# EAGLE board thermochromic heater simple cutout (EAGLE 9.4.2), part 1 of 2
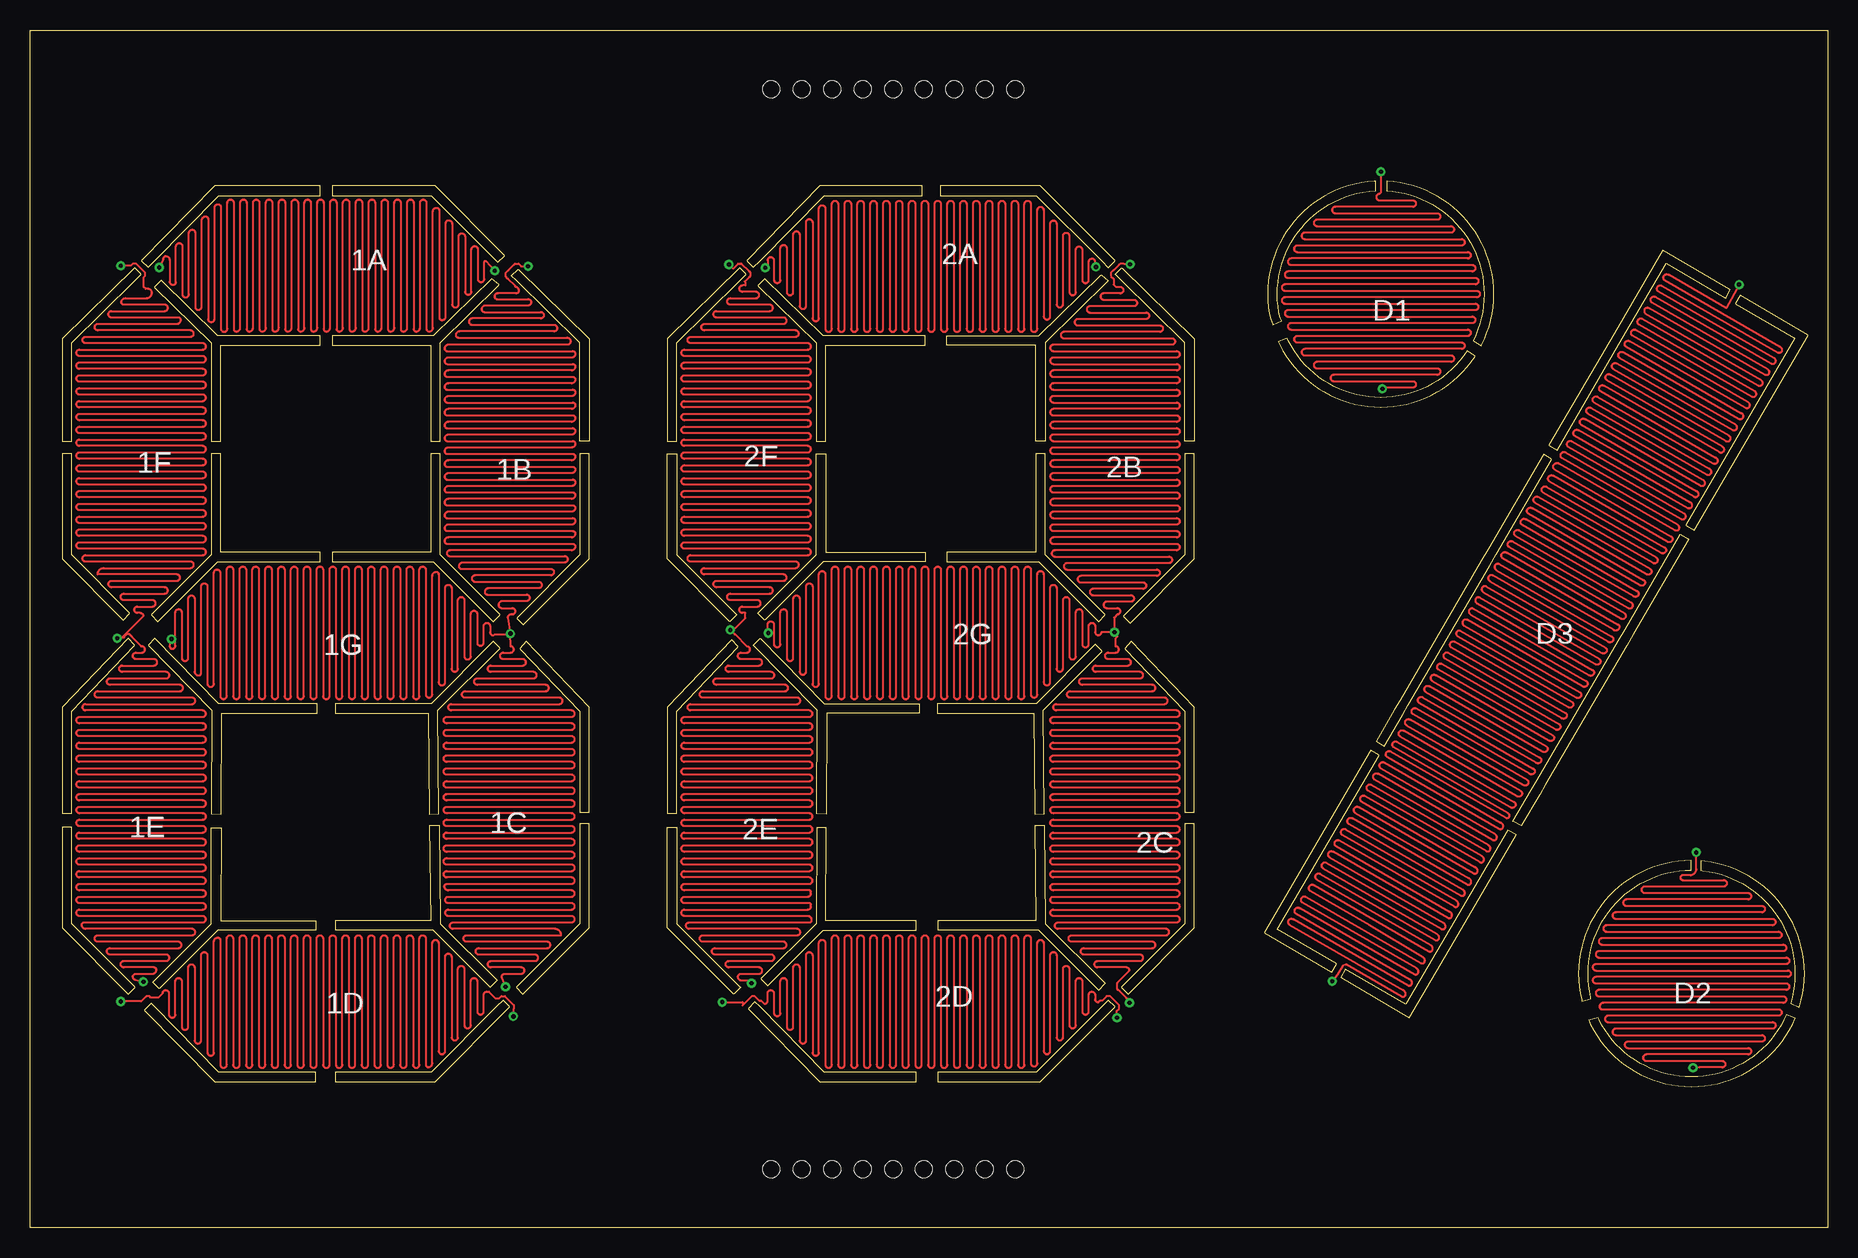
[diagram p0: board, top side]
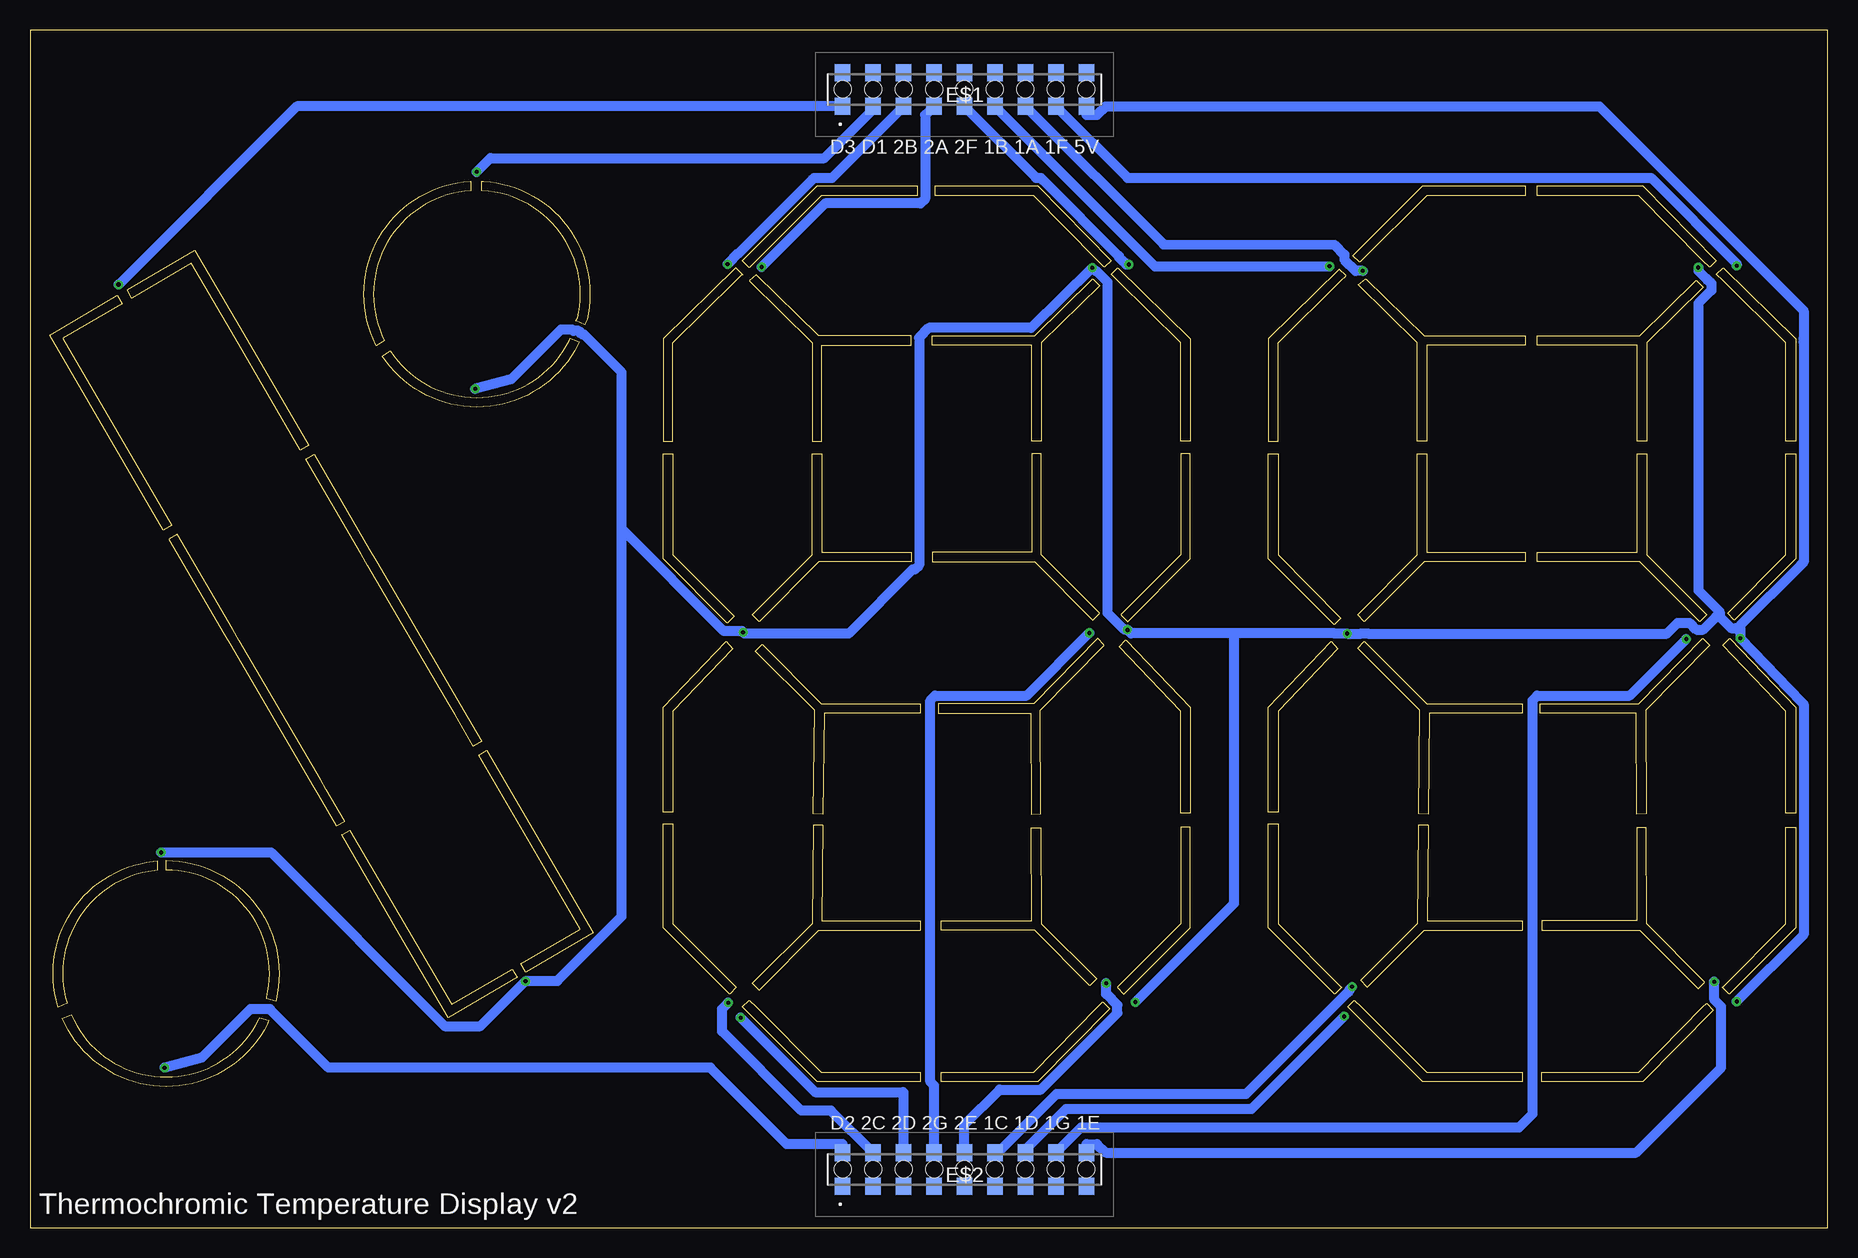
[diagram p1: board, bottom side, seen from below]

Size 149.8 x 99.8 mm. Coordinates in mm from the lower left corner, seen from the top.
Outline: 790 segments
Copper layers (1*16): Top 0.035mm / dielectric 1.5mm / Bottom 0.035mm
Design rules "default *": minimum track width 6mil, minimum drill 0.35mm, track to track 6mil, track to pad 6mil, pad to pad 6mil, via to via 6mil, smd to smd 6mil, copper to edge 10mil, drill to drill 6mil, minimum pad ring 10mil, minimum via ring 8mil, stop-mask expansion 4mil, vias tented up to drill 0mil, thermal gap 10mil

## Footprints (pad centres in the part's own frame; a part is rotated, then mirrored left to right if it is on the bottom)
91601309LF = smd 1.27 x 1.4: 1 -10.16,-1.4; 2 -7.62,-1.4; 3 -5.08,-1.4; 4 -2.54,-1.4; 5 0,-1.4; 6 2.54,-1.4; 7 5.08,-1.4; 8 7.62,-1.4; 9 10.16,-1.4; 10 10.16,1.4; 11 7.62,1.4; 12 5.08,1.4; 13 2.54,1.4; 14 0,1.4; 15 -2.54,1.4; 16 -5.08,1.4; 17 -7.62,1.4; 18 -10.16,1.4 | hole 1.4: -10.16,0; -7.62,0; -5.08,0; -2.54,0; 0,0; 2.54,0; 5.08,0; 7.62,0; 10.16,0

## Placement (x,y rotation side)
E$1  [91601309LF]  71.93,94.85 0 bottom
E$2  [91601309LF]  71.93,4.85 0 bottom

## Library data of the parts
E$1 E$2 = SamacSys_Parts

## Nets
S$5: E$1.1 E$1.2 E$1.3 E$1.4 E$1.5 E$1.6 E$1.7 E$1.8 E$1.9 E$2.10 E$2.11 E$2.12 E$2.13 E$2.14 E$2.15 E$2.16 E$2.17 E$2.18

## Tracks (layer width: path | path; a pad name or v marks a point on that pad's centre or on a via)
S$5  (via drill 0.35)
  Top 0.152: v90.38,49.6 90.35,49.63 | v90.38,49.6 90.61,49.38 90.61,49.25 90.47,49.11 90.47,48.45 arc-90 90.73,48.18 arc-90 90.47,47.91 89.86,47.91 arc90 89.59,47.64 arc90 89.86,47.38 91.48,47.38 arc-90 91.75,47.11 arc-90 91.48,46.84 88.84,46.84 arc90 88.57,46.57 arc90 88.84,46.31 92.5,46.31 arc-90 92.77,46.04 arc-90 92.5,45.77 87.7,45.77 arc90 87.43,45.5 arc90 87.7,45.24 93.51,45.24 arc-90 93.78,44.97 arc-90 93.51,44.7 86.68,44.7 arc90 86.41,44.43 arc90 86.68,44.16 94.53,44.16 arc-90 94.8,43.9 arc-90 94.53,43.63 85.54,43.63 arc90 85.27,43.36 arc90 85.54,43.09 95.55,43.09 arc-90 95.81,42.83 95.81,42.83 arc-90 95.55,42.56 85.28,42.56 arc90 85.02,42.29 85.02,42.29 arc90 85.28,42.02 95.55,42.02 arc-90 95.81,41.76 95.81,41.76 arc-90 95.55,41.49 85.28,41.49 arc90 85.02,41.22 85.02,41.22 arc90 85.28,40.95 95.55,40.95 arc-90 95.81,40.69 95.81,40.68 arc-90 95.55,40.42 85.28,40.42 arc90 85.02,40.15 85.02,40.15 arc90 85.28,39.88 95.55,39.88 arc-90 95.81,39.62 95.81,39.61 arc-90 95.55,39.35 85.28,39.35 arc90 85.02,39.08 85.02,39.08 arc90 85.28,38.81 95.55,38.81 arc-90 95.81,38.55 95.81,38.54 arc-90 95.55,38.28 85.28,38.28 arc90 85.02,38.01 85.02,38.01 arc90 85.28,37.74 95.55,37.74 arc-90 95.81,37.47 95.81,37.47 arc-90 95.55,37.21 85.28,37.21 arc90 85.02,36.94 85.02,36.94 arc90 85.28,36.67 95.55,36.67 arc-90 95.81,36.4 95.81,36.4 arc-90 95.55,36.14 85.28,36.14 arc90 85.02,35.87 85.02,35.87 arc90 85.28,35.6 95.55,35.6 arc-90 95.81,35.33 95.81,35.33 arc-90 95.55,35.07 85.28,35.07 arc90 85.02,34.8 85.02,34.8 arc90 85.28,34.53 95.55,34.53 arc-90 95.81,34.26 95.81,34.26 arc-90 95.55,33.99 85.28,33.99 arc90 85.02,33.73 85.02,33.73 arc90 85.28,33.46 95.55,33.46 arc-90 95.81,33.19 95.81,33.19 arc-90 95.55,32.92 85.28,32.92 arc90 85.02,32.66 85.02,32.66 arc90 85.28,32.39 95.55,32.39 arc-90 95.81,32.12 95.81,32.12 arc-90 95.55,31.85 85.28,31.85 arc90 85.02,31.59 85.02,31.59 arc90 85.28,31.32 95.55,31.32 arc-90 95.81,31.05 95.81,31.05 arc-90 95.55,30.78 85.28,30.78 arc90 85.02,30.52 85.02,30.51 arc90 85.28,30.25 95.55,30.25 arc-90 95.81,29.98 95.81,29.98 arc-90 95.55,29.71 85.28,29.71 arc90 85.02,29.45 85.02,29.44 arc90 85.28,29.18 95.55,29.18 arc-90 95.81,28.91 95.81,28.91 arc-90 95.55,28.64 85.28,28.64 arc90 85.02,28.38 85.02,28.37 arc90 85.28,28.11 95.55,28.11 arc-90 95.81,27.84 95.81,27.84 arc-90 95.55,27.57 85.28,27.57 arc90 85.02,27.31 85.02,27.3 arc90 85.28,27.04 95.55,27.04 arc-90 95.81,26.77 95.81,26.77 arc-90 95.55,26.5 85.28,26.5 arc90 85.02,26.23 85.02,26.23 arc90 85.28,25.97 95.55,25.97 arc-90 95.81,25.7 95.81,25.7 arc-90 95.55,25.43 85.67,25.43 arc90 85.4,25.16 arc90 85.67,24.9 94.66,24.9 arc-90 94.92,24.63 arc-90 94.66,24.36 86.81,24.36 arc90 86.54,24.09 arc90 86.81,23.83 93.51,23.83 arc-90 93.78,23.56 arc-90 93.51,23.29 87.82,23.29 arc90 87.56,23.02 arc90 87.82,22.75 92.5,22.75 arc-90 92.77,22.49 arc-90 92.5,22.22 88.97,22.22 arc90 88.7,21.95 arc90 88.97,21.68 91.35,21.68 arc-90 91.62,21.42 90.61,20.4 90.61,19.89 90.7,19.8
  Top 0.152: v138.87,31.27 138.87,29.9 arc-90 138.34,29.38 137.74,29.38 arc90 137.53,29.17 arc90 137.74,28.96 141.14,28.96 arc-90 141.41,28.69 arc-90 141.14,28.43 134.56,28.43 arc90 134.29,28.16 arc90 134.56,27.89 143.17,27.89 arc-90 143.44,27.62 arc-90 143.17,27.35 133.04,27.35 arc90 132.77,27.08 arc90 133.04,26.81 144.31,26.81 arc-90 144.58,26.54 arc-90 144.31,26.27 132.15,26.27 arc90 131.88,26 arc90 132.15,25.73 145.2,25.73 arc-90 145.47,25.46 arc-90 145.2,25.19 131.39,25.19 arc90 131.12,24.93 arc90 131.39,24.66 145.71,24.66 arc-90 145.98,24.39 arc-90 145.71,24.12 131,24.12 arc90 130.74,23.85 arc90 131,23.58 146.09,23.58 arc-90 146.36,23.31 arc-90 146.09,23.04 130.75,23.04 arc90 130.48,22.77 130.48,22.77 arc90 130.75,22.5 146.35,22.5 arc-90 146.61,22.23 arc-90 146.35,21.96 130.5,21.96 arc90 130.23,21.7 arc90 130.5,21.43 146.47,21.43 arc-90 146.74,21.16 arc-90 146.47,20.89 130.5,20.89 arc90 130.23,20.62 arc90 130.5,20.35 146.35,20.35 arc-90 146.61,20.08 146.61,20.08 arc-90 146.35,19.81 130.75,19.81 arc90 130.48,19.54 130.48,19.54 arc90 130.75,19.27 146.09,19.27 arc-90 146.36,19 arc-90 146.09,18.73 131.13,18.73 arc90 130.8,18.4 arc90 131,18.2 145.71,18.2 arc-90 145.98,17.93 arc-90 145.71,17.66 131.51,17.66 arc90 131.24,17.39 arc90 131.51,17.12 145.2,17.12 arc-90 145.47,16.85 arc-90 145.2,16.58 132.15,16.58 arc90 131.88,16.31 arc90 132.15,16.04 144.31,16.04 arc-90 144.58,15.77 arc-90 144.31,15.5 133.16,15.5 arc90 132.89,15.23 arc90 133.16,14.97 143.17,14.97 arc-90 143.44,14.7 arc-90 143.17,14.43 134.69,14.43 arc90 134.42,14.16 arc90 134.69,13.89 141.01,13.89 arc-90 141.28,13.62 arc-90 141.01,13.35 139.12,13.35 v138.59,13.33
  Top 0.152: v10.77,80.01 11.09,80.71 arc-90 11.34,80.95 arc-90 11.63,80.66 11.63,78.85 arc90 11.92,78.56 arc90 12.16,78.8 12.16,81.77 arc-90 12.43,82.04 arc-90 12.7,81.77 12.7,77.79 arc90 12.97,77.52 arc90 13.24,77.79 13.24,82.87 arc-90 13.53,83.16 arc-90 13.77,82.92 13.77,76.72 arc90 14.01,76.48 arc90 14.31,76.77 14.31,83.93 arc-90 14.64,84.26 arc-90 14.84,84.06 14.84,75.73 arc90 15.11,75.46 arc90 15.38,75.73 15.38,84.97 arc-90 15.68,85.28 arc-90 15.91,85.05 15.91,74.92 arc90 16.18,74.65 arc90 16.45,74.92 16.45,85.41 arc-90 16.71,85.67 16.72,85.67 arc-90 16.98,85.41 16.98,74.89 arc90 17.2,74.67 17.2,74.67 arc90 17.52,74.99 17.52,85.41 arc-90 17.78,85.67 17.79,85.67 arc-90 18.05,85.41 18.05,74.89 arc90 18.27,74.67 18.27,74.67 arc90 18.59,74.99 18.59,85.41 arc-90 18.85,85.67 18.86,85.67 arc-90 19.12,85.41 19.12,74.89 arc90 19.34,74.67 19.34,74.67 arc90 19.66,74.99 19.66,85.41 arc-90 19.93,85.67 19.93,85.67 arc-90 20.19,85.41 20.19,74.89 arc90 20.41,74.67 20.41,74.67 arc90 20.73,74.99 20.73,85.41 arc-90 21,85.67 21,85.67 arc-90 21.26,85.41 21.26,74.89 arc90 21.48,74.67 21.48,74.67 arc90 21.8,74.99 21.8,85.41 arc-90 22.07,85.67 22.07,85.67 arc-90 22.33,85.41 22.33,74.89 arc90 22.55,74.67 22.55,74.67 arc90 22.87,74.99 22.87,85.41 arc-90 23.14,85.67 23.14,85.67 arc-90 23.41,85.41 23.41,74.89 arc90 23.62,74.67 23.62,74.67 arc90 23.94,74.99 23.94,85.41 arc-90 24.21,85.67 24.21,85.67 arc-90 24.48,85.41 24.48,74.89 arc90 24.69,74.67 24.69,74.67 arc90 25.01,74.99 25.01,85.41 arc-90 25.28,85.67 25.28,85.67 arc-90 25.55,85.41 25.55,74.89 arc90 25.76,74.67 25.76,74.67 arc90 26.08,74.99 26.08,85.41 arc-90 26.35,85.67 26.35,85.67 arc-90 26.62,85.41 26.62,74.89 arc90 26.83,74.67 26.83,74.67 arc90 27.15,74.99 27.15,85.41 arc-90 27.42,85.67 27.42,85.67 arc-90 27.69,85.41 27.69,74.89 arc90 27.9,74.67 27.9,74.67 arc90 28.22,74.99 28.22,85.41 arc-90 28.49,85.67 28.49,85.67 arc-90 28.76,85.41 28.76,74.89 arc90 28.97,74.67 28.98,74.67 arc90 29.29,74.99 29.29,85.41 arc-90 29.56,85.67 29.56,85.67 arc-90 29.83,85.41 29.83,74.89 arc90 30.04,74.67 30.05,74.67 arc90 30.36,74.99 30.36,85.41 arc-90 30.63,85.67 30.63,85.67 arc-90 30.9,85.41 30.9,74.89 arc90 31.11,74.67 31.12,74.67 arc90 31.43,74.99 31.43,85.41 arc-90 31.7,85.67 31.7,85.67 arc-90 31.97,85.41 31.97,74.89 arc90 32.19,74.67 32.19,74.67 arc90 32.5,74.99 32.5,85.41 arc-90 32.77,85.67 32.77,85.67 arc-90 33.04,85.41 33.04,74.89 arc90 33.26,74.67 33.26,74.67 arc90 33.57,74.99 33.57,84.69 arc-90 33.87,84.99 arc-90 34.11,84.74 34.11,75.86 arc90 34.34,75.63 arc90 34.65,75.93 34.65,83.7 arc-90 34.89,83.95 arc-90 35.18,83.65 35.18,76.95 arc90 35.45,76.68 arc90 35.72,76.95 35.72,82.59 arc-90 35.98,82.85 arc-90 36.25,82.59 36.25,78.01 arc90 36.52,77.75 arc90 36.79,78.01 36.79,81.52 arc-90 37.05,81.79 arc-90 37.32,81.52 37.32,79.06 arc90 37.59,78.79 arc90 37.86,79.06 37.86,80.45 arc-90 37.97,80.56 v38.74,79.73
  Top 0.152: v40.03,49.5 39.8,50.83 arc-90 40.07,51.09 40.17,51.09 arc90 40.44,51.36 arc90 40.17,51.63 39.31,51.63 arc-90 39.04,51.9 arc-90 39.36,52.21 41.37,52.21 arc90 41.64,52.48 arc90 41.37,52.75 38.12,52.75 arc-90 37.9,52.97 arc-90 38.22,53.29 42.38,53.29 arc90 42.65,53.55 arc90 42.38,53.82 37.1,53.82 arc-90 36.82,54.1 arc-90 37.08,54.36 43.4,54.36 arc90 43.67,54.62 arc90 43.4,54.89 35.96,54.89 arc-90 35.74,55.11 arc-90 36.06,55.43 44.54,55.43 arc90 44.81,55.69 arc90 44.54,55.96 34.97,55.96 arc-90 34.74,56.19 arc-90 34.99,56.45 45.13,56.45 arc90 45.44,56.76 45.44,56.77 arc90 45.23,56.98 34.76,56.98 arc-90 34.55,57.2 34.55,57.2 arc-90 34.87,57.52 45.13,57.52 arc90 45.44,57.83 45.44,57.84 arc90 45.23,58.05 34.76,58.05 arc-90 34.55,58.27 34.55,58.27 arc-90 34.87,58.59 45.13,58.59 arc90 45.44,58.9 45.44,58.91 arc90 45.23,59.12 34.76,59.12 arc-90 34.55,59.34 34.55,59.34 arc-90 34.87,59.66 45.13,59.66 arc90 45.44,59.98 45.44,59.98 arc90 45.23,60.19 34.76,60.19 arc-90 34.55,60.41 34.55,60.41 arc-90 34.87,60.73 45.13,60.73 arc90 45.44,61.05 45.44,61.05 arc90 45.23,61.26 34.76,61.26 arc-90 34.55,61.48 34.55,61.48 arc-90 34.87,61.8 45.13,61.8 arc90 45.44,62.12 45.44,62.12 arc90 45.23,62.33 34.76,62.33 arc-90 34.55,62.55 34.55,62.55 arc-90 34.87,62.87 45.13,62.87 arc90 45.44,63.19 45.44,63.19 arc90 45.23,63.4 34.76,63.4 arc-90 34.55,63.62 34.55,63.62 arc-90 34.87,63.94 45.13,63.94 arc90 45.44,64.26 45.44,64.26 arc90 45.23,64.47 34.76,64.47 arc-90 34.55,64.69 34.55,64.69 arc-90 34.87,65.01 45.13,65.01 arc90 45.44,65.33 45.44,65.33 arc90 45.23,65.55 34.76,65.55 arc-90 34.55,65.76 34.55,65.76 arc-90 34.87,66.08 45.13,66.08 arc90 45.44,66.4 45.44,66.4 arc90 45.23,66.62 34.76,66.62 arc-90 34.55,66.83 34.55,66.83 arc-90 34.87,67.15 45.13,67.15 arc90 45.44,67.47 45.44,67.47 arc90 45.23,67.69 34.76,67.69 arc-90 34.55,67.9 34.55,67.9 arc-90 34.87,68.22 45.13,68.22 arc90 45.44,68.54 45.44,68.54 arc90 45.23,68.76 34.76,68.76 arc-90 34.55,68.97 34.55,68.97 arc-90 34.87,69.29 45.13,69.29 arc90 45.44,69.61 45.44,69.61 arc90 45.23,69.83 34.76,69.83 arc-90 34.55,70.04 34.55,70.05 arc-90 34.87,70.36 45.13,70.36 arc90 45.44,70.68 45.44,70.68 arc90 45.23,70.9 34.76,70.9 arc-90 34.55,71.11 34.55,71.12 arc-90 34.87,71.43 45.13,71.43 arc90 45.44,71.75 45.44,71.75 arc90 45.23,71.97 34.76,71.97 arc-90 34.55,72.18 34.55,72.19 arc-90 34.87,72.5 45.13,72.5 arc90 45.44,72.82 45.44,72.82 arc90 45.23,73.04 34.76,73.04 arc-90 34.55,73.25 34.55,73.26 arc-90 34.87,73.57 44.77,73.57 arc90 45.05,73.85 arc90 44.75,74.16 35.7,74.16 arc-90 35.49,74.38 arc-90 35.8,74.7 43.68,74.7 arc90 43.93,74.95 arc90 43.65,75.23 36.85,75.23 arc-90 36.58,75.5 arc-90 36.85,75.77 42.56,75.77 arc90 42.83,76.03 arc90 42.56,76.3 37.86,76.3 arc-90 37.63,76.53 arc-90 37.94,76.84 41.49,76.84 arc90 41.76,77.1 arc90 41.49,77.37 38.93,77.37 arc-90 38.71,77.59 arc-90 38.98,77.86 40.5,77.86 arc90 40.75,78.1 arc90 40.45,78.39 40.45,78.48 39.83,79.09 39.64,79.29 39.64,79.56 39.76,79.68 39.85,79.77 39.86,79.77 40.33,80.24 40.42,80.34 40.43,80.34 40.71,80.34 40.94,80.11 v41.51,80.11
  Top 0.152: v11.79,49.05 11.66,48.42 arc90 11.85,48.23 arc90 12.11,48.5 12.11,51.27 arc-90 12.38,51.54 arc-90 12.65,51.27 12.65,47.48 arc90 12.92,47.22 arc90 13.18,47.48 13.18,52.41 arc-90 13.45,52.68 arc-90 13.72,52.41 13.72,46.34 arc90 14.05,46.01 arc90 14.26,46.21 14.26,53.43 arc-90 14.52,53.69 arc-90 14.79,53.43 14.79,45.32 arc90 15.06,45.06 arc90 15.33,45.32 15.33,54.57 arc-90 15.59,54.84 arc-90 15.86,54.57 15.86,44.31 arc90 16.13,44.04 16.13,44.04 arc90 16.4,44.31 16.4,54.82 arc-90 16.66,55.09 16.66,55.09 arc-90 16.93,54.82 16.93,44.31 arc90 17.2,44.04 17.2,44.04 arc90 17.47,44.31 17.47,54.82 arc-90 17.73,55.09 17.74,55.09 arc-90 18,54.82 18,44.31 arc90 18.27,44.04 18.27,44.04 arc90 18.54,44.31 18.54,54.82 arc-90 18.8,55.09 18.81,55.09 arc-90 19.07,54.82 19.07,44.31 arc90 19.34,44.04 19.34,44.04 arc90 19.61,44.31 19.61,54.82 arc-90 19.87,55.09 19.88,55.09 arc-90 20.14,54.82 20.14,44.31 arc90 20.41,44.04 20.41,44.04 arc90 20.68,44.31 20.68,54.82 arc-90 20.94,55.09 20.95,55.09 arc-90 21.21,54.82 21.21,44.31 arc90 21.48,44.04 21.48,44.04 arc90 21.75,44.31 21.75,54.82 arc-90 22.02,55.09 22.02,55.09 arc-90 22.28,54.82 22.28,44.31 arc90 22.55,44.04 22.55,44.04 arc90 22.82,44.31 22.82,54.82 arc-90 23.09,55.09 23.09,55.09 arc-90 23.35,54.82 23.35,44.31 arc90 23.62,44.04 23.62,44.04 arc90 23.89,44.31 23.89,54.82 arc-90 24.16,55.09 24.16,55.09 arc-90 24.42,54.82 24.42,44.31 arc90 24.69,44.04 24.69,44.04 arc90 24.96,44.31 24.96,54.82 arc-90 25.23,55.09 25.23,55.09 arc-90 25.5,54.82 25.5,44.31 arc90 25.76,44.04 25.76,44.04 arc90 26.03,44.31 26.03,54.82 arc-90 26.3,55.09 26.3,55.09 arc-90 26.57,54.82 26.57,44.31 arc90 26.83,44.04 26.83,44.04 arc90 27.1,44.31 27.1,54.82 arc-90 27.37,55.09 27.37,55.09 arc-90 27.64,54.82 27.64,44.31 arc90 27.9,44.04 27.9,44.04 arc90 28.17,44.31 28.17,54.82 arc-90 28.44,55.09 28.44,55.09 arc-90 28.71,54.82 28.71,44.31 arc90 28.97,44.04 28.98,44.04 arc90 29.24,44.31 29.24,54.82 arc-90 29.51,55.09 29.51,55.09 arc-90 29.78,54.82 29.78,44.31 arc90 30.04,44.04 30.05,44.04 arc90 30.31,44.31 30.31,54.82 arc-90 30.58,55.09 30.58,55.09 arc-90 30.85,54.82 30.85,44.31 arc90 31.11,44.04 31.12,44.04 arc90 31.38,44.31 31.38,54.82 arc-90 31.65,55.09 31.65,55.09 arc-90 31.92,54.82 31.92,44.31 arc90 32.19,44.04 32.19,44.04 arc90 32.45,44.31 32.45,54.82 arc-90 32.72,55.09 32.72,55.09 arc-90 32.99,54.82 32.99,44.44 arc90 33.26,44.17 arc90 33.52,44.44 33.52,54.32 arc-90 33.86,54.65 arc-90 34.06,54.44 34.06,45.45 arc90 34.33,45.18 arc90 34.59,45.45 34.59,53.3 arc-90 34.86,53.57 arc-90 35.13,53.3 35.13,46.59 arc90 35.4,46.33 arc90 35.67,46.59 35.67,52.28 arc-90 35.93,52.55 arc-90 36.2,52.28 36.2,47.61 arc90 36.47,47.34 arc90 36.74,47.61 36.74,51.14 arc-90 37,51.41 arc-90 37.27,51.14 37.27,48.75 arc90 37.54,48.49 arc90 37.81,48.75 37.81,50.12 arc-90 38.07,50.39 arc-90 38.34,50.12 38.34,49.62 arc90 38.61,49.35 38.63,49.35 38.72,49.43 39.97,49.43 v40.03,49.5
  Top 0.152: v9.45,20.5 8.79,20.65 arc-90 8.56,20.88 arc-90 8.83,21.15 10.2,21.15 arc90 10.53,21.48 arc90 10.33,21.68 7.81,21.68 arc-90 7.55,21.95 arc-90 7.81,22.22 11.34,22.22 arc90 11.61,22.49 arc90 11.34,22.75 6.67,22.75 arc-90 6.4,23.02 arc-90 6.67,23.29 12.36,23.29 arc90 12.63,23.56 arc90 12.36,23.83 5.66,23.83 arc-90 5.39,24.09 arc-90 5.66,24.36 13.5,24.36 arc90 13.77,24.63 arc90 13.5,24.9 4.64,24.9 arc-90 4.31,25.23 arc-90 4.51,25.43 14.39,25.43 arc90 14.66,25.7 14.66,25.7 arc90 14.39,25.97 4.13,25.97 arc-90 3.86,26.23 3.86,26.23 arc-90 4.13,26.5 14.39,26.5 arc90 14.66,26.77 14.66,26.77 arc90 14.39,27.04 4.13,27.04 arc-90 3.86,27.3 3.86,27.31 arc-90 4.13,27.57 14.39,27.57 arc90 14.66,27.84 14.66,27.84 arc90 14.39,28.11 4.13,28.11 arc-90 3.86,28.37 3.86,28.38 arc-90 4.13,28.64 14.39,28.64 arc90 14.66,28.91 14.66,28.91 arc90 14.39,29.18 4.13,29.18 arc-90 3.86,29.44 3.86,29.45 arc-90 4.13,29.71 14.39,29.71 arc90 14.66,29.98 14.66,29.98 arc90 14.39,30.25 4.13,30.25 arc-90 3.86,30.51 3.86,30.52 arc-90 4.13,30.78 14.39,30.78 arc90 14.66,31.05 14.66,31.05 arc90 14.39,31.32 4.13,31.32 arc-90 3.86,31.59 3.86,31.59 arc-90 4.13,31.85 14.39,31.85 arc90 14.66,32.12 14.66,32.12 arc90 14.39,32.39 4.13,32.39 arc-90 3.86,32.66 3.86,32.66 arc-90 4.13,32.92 14.39,32.92 arc90 14.66,33.19 14.66,33.19 arc90 14.39,33.46 4.13,33.46 arc-90 3.86,33.73 3.86,33.73 arc-90 4.13,33.99 14.39,33.99 arc90 14.66,34.26 14.66,34.26 arc90 14.39,34.53 4.13,34.53 arc-90 3.86,34.8 3.86,34.8 arc-90 4.13,35.07 14.39,35.07 arc90 14.66,35.33 14.66,35.33 arc90 14.39,35.6 4.13,35.6 arc-90 3.86,35.87 3.86,35.87 arc-90 4.13,36.14 14.39,36.14 arc90 14.66,36.4 14.66,36.4 arc90 14.39,36.67 4.13,36.67 arc-90 3.86,36.94 3.86,36.94 arc-90 4.13,37.21 14.39,37.21 arc90 14.66,37.47 14.66,37.47 arc90 14.39,37.74 4.13,37.74 arc-90 3.86,38.01 3.86,38.01 arc-90 4.13,38.28 14.39,38.28 arc90 14.66,38.54 14.66,38.55 arc90 14.39,38.81 4.13,38.81 arc-90 3.86,39.08 3.86,39.08 arc-90 4.13,39.35 14.39,39.35 arc90 14.66,39.61 14.66,39.62 arc90 14.39,39.88 4.13,39.88 arc-90 3.86,40.15 3.86,40.15 arc-90 4.13,40.42 14.39,40.42 arc90 14.66,40.68 14.66,40.69 arc90 14.39,40.95 4.13,40.95 arc-90 3.86,41.22 3.86,41.22 arc-90 4.13,41.49 14.39,41.49 arc90 14.66,41.76 14.66,41.76 arc90 14.39,42.02 4.13,42.02 arc-90 3.86,42.29 3.86,42.29 arc-90 4.13,42.56 14.39,42.56 arc90 14.66,42.83 14.66,42.83 arc90 14.39,43.09 4.64,43.09 arc-90 4.37,43.36 arc-90 4.64,43.63 13.5,43.63 arc90 13.77,43.9 arc90 13.5,44.16 5.66,44.16 arc-90 5.39,44.43 arc-90 5.66,44.7 12.49,44.7 arc90 12.76,44.97 arc90 12.49,45.24 6.67,45.24 arc-90 6.4,45.5 arc-90 6.67,45.77 11.34,45.77 arc90 11.61,46.04 arc90 11.34,46.31 7.69,46.31 arc-90 7.42,46.57 arc-90 7.69,46.84 10.33,46.84 arc90 10.6,47.11 arc90 10.33,47.38 8.83,47.38 arc-90 8.56,47.64 arc-90 8.83,47.91 9.31,47.91 arc90 9.58,48.18 arc90 9.31,48.45 9.26,48.45 9.05,48.66 8.5,49.24 8.4,49.33 8.31,49.42 8.3,49.42 8.3,49.43 8.03,49.43 7.72,49.12 v7.27,49.12 7.62,49.12 9.45,50.95 arc90 9.19,51.22 8.96,51.22 arc-90 8.69,51.49 arc-90 8.96,51.76 10.2,51.76 arc90 10.47,52.02 arc90 10.2,52.29 7.81,52.29 arc-90 7.55,52.56 arc-90 7.81,52.83 11.22,52.83 arc90 11.49,53.09 arc90 11.22,53.36 6.8,53.36 arc-90 6.53,53.63 arc-90 6.8,53.9 12.23,53.9 arc90 12.5,54.16 arc90 12.23,54.43 5.63,54.43 arc-90 6.16,54.97 13.38,54.97 arc90 13.64,55.24 arc90 13.38,55.5 4.64,55.5 arc-90 4.37,55.77 arc-90 4.64,56.04 14.39,56.04 arc90 14.66,56.3 14.66,56.31 arc90 14.39,56.57 4.13,56.57 arc-90 3.86,56.84 3.86,56.84 arc-90 4.13,57.11 14.39,57.11 arc90 14.66,57.38 14.66,57.38 arc90 14.39,57.64 4.13,57.64 arc-90 3.86,57.91 3.86,57.91 arc-90 4.13,58.18 14.39,58.18 arc90 14.66,58.45 14.66,58.45 arc90 14.39,58.71 4.13,58.71 arc-90 3.86,58.98 3.86,58.98 arc-90 4.13,59.25 14.39,59.25 arc90 14.66,59.52 14.66,59.52 arc90 14.39,59.78 4.13,59.78 arc-90 3.86,60.05 3.86,60.05 arc-90 4.13,60.32 14.39,60.32 arc90 14.66,60.59 14.66,60.59 arc90 14.39,60.86 4.13,60.86 arc-90 3.86,61.12 3.86,61.12 arc-90 4.13,61.39 14.39,61.39 arc90 14.66,61.66 14.66,61.66 arc90 14.39,61.93 4.13,61.93 arc-90 3.86,62.19 3.86,62.19 arc-90 4.13,62.46 14.39,62.46 arc90 14.66,62.73 14.66,62.73 arc90 14.39,63 4.13,63 arc-90 3.86,63.26 3.86,63.26 arc-90 4.13,63.53 14.39,63.53 arc90 14.66,63.8 14.66,63.8 arc90 14.39,64.07 4.13,64.07 arc-90 3.86,64.33 3.86,64.34 arc-90 4.13,64.6 14.39,64.6 arc90 14.66,64.87 14.66,64.87 arc90 14.39,65.14 4.13,65.14 arc-90 3.86,65.4 3.86,65.41 arc-90 4.13,65.67 14.39,65.67 arc90 14.66,65.94 14.66,65.94 arc90 14.39,66.21 4.13,66.21 arc-90 3.86,66.47 3.86,66.48 arc-90 4.13,66.74 14.39,66.74 arc90 14.66,67.01 14.66,67.01 arc90 14.39,67.28 4.13,67.28 arc-90 3.86,67.54 3.86,67.55 arc-90 4.13,67.81 14.39,67.81 arc90 14.66,68.08 14.66,68.08 arc90 14.39,68.35 4.13,68.35 arc-90 3.86,68.62 3.86,68.62 arc-90 4.13,68.88 14.39,68.88 arc90 14.66,69.15 14.66,69.15 arc90 14.39,69.42 4.13,69.42 arc-90 3.86,69.69 3.86,69.69 arc-90 4.13,69.95 14.39,69.95 arc90 14.66,70.22 14.66,70.22 arc90 14.39,70.49 4.13,70.49 arc-90 3.86,70.76 3.86,70.76 arc-90 4.13,71.02 14.39,71.02 arc90 14.66,71.29 14.66,71.29 arc90 14.39,71.56 4.13,71.56 arc-90 3.86,71.83 3.86,71.83 arc-90 4.13,72.1 14.39,72.1 arc90 14.66,72.36 14.66,72.36 arc90 14.39,72.63 4.13,72.63 arc-90 3.86,72.9 3.86,72.9 arc-90 4.13,73.17 14.39,73.17 arc90 14.66,73.43 14.66,73.43 arc90 14.39,73.7 4.64,73.7 arc-90 4.37,73.97 arc-90 4.64,74.24 13.38,74.24 arc90 13.64,74.5 arc90 13.38,74.77 5.66,74.77 arc-90 5.39,75.04 arc-90 5.66,75.31 12.23,75.31 arc90 12.56,75.64 arc90 12.36,75.84 6.8,75.84 arc-90 6.53,76.11 arc-90 6.8,76.38 11.22,76.38 arc90 11.49,76.64 arc90 11.22,76.91 7.81,76.91 arc-90 7.61,77.12 arc-90 7.94,77.45 9.69,77.45 arc90 10.15,77.91 arc90 9.82,78.23 9.63,78.23 9.49,78.37 9.49,79.21 9.59,79.31 9.59,79.58 9.59,79.59 9.49,79.68 8.85,80.34 8.71,80.34 8.56,80.34 8.38,80.16 v7.57,80.16
  Top 0.152: v39.63,20.06 39.33,20.85 arc-90 39.3,20.88 arc-90 39.56,21.15 40.94,21.15 arc90 41.2,21.42 arc90 40.94,21.68 38.42,21.68 arc-90 38.15,21.95 arc-90 38.42,22.22 42.08,22.22 arc90 42.35,22.49 arc90 42.08,22.75 37.41,22.75 arc-90 37.14,23.02 arc-90 37.41,23.29 43.09,23.29 arc90 43.36,23.56 arc90 43.09,23.83 36.39,23.83 arc-90 36.12,24.09 arc-90 36.39,24.36 44.27,24.36 arc90 43.73,24.9 35.25,24.9 arc-90 34.98,25.16 arc-90 35.25,25.43 45.13,25.43 arc90 45.39,25.7 45.39,25.7 arc90 45.13,25.97 34.87,25.97 arc-90 34.6,26.23 34.6,26.23 arc-90 34.87,26.5 45.13,26.5 arc90 45.39,26.77 45.39,26.77 arc90 45.13,27.04 34.87,27.04 arc-90 34.6,27.3 arc-90 34.87,27.57 45.13,27.57 arc90 45.39,27.84 45.39,27.84 arc90 45.13,28.11 34.87,28.11 arc-90 34.53,28.44 arc-90 34.74,28.64 45.13,28.64 arc90 45.39,28.91 45.39,28.91 arc90 45.13,29.18 34.74,29.18 arc-90 34.47,29.44 34.47,29.45 arc-90 34.74,29.71 45.13,29.71 arc90 45.39,29.98 45.39,29.98 arc90 45.13,30.25 34.74,30.25 arc-90 34.47,30.51 34.47,30.52 arc-90 34.74,30.78 45.13,30.78 arc90 45.39,31.05 45.39,31.05 arc90 45.13,31.32 34.74,31.32 arc-90 34.47,31.59 34.47,31.59 arc-90 34.74,31.85 45.13,31.85 arc90 45.39,32.12 45.39,32.12 arc90 45.13,32.39 34.74,32.39 arc-90 34.47,32.66 34.47,32.66 arc-90 34.74,32.92 45.13,32.92 arc90 45.39,33.19 45.39,33.19 arc90 45.13,33.46 34.74,33.46 arc-90 34.47,33.73 34.47,33.73 arc-90 34.74,33.99 45.13,33.99 arc90 45.39,34.26 45.39,34.26 arc90 45.13,34.53 34.74,34.53 arc-90 34.47,34.8 34.47,34.8 arc-90 34.74,35.07 45.13,35.07 arc90 45.39,35.33 45.39,35.33 arc90 45.13,35.6 34.74,35.6 arc-90 34.47,35.87 34.47,35.87 arc-90 34.74,36.14 45.13,36.14 arc90 45.39,36.4 45.39,36.4 arc90 45.13,36.67 34.74,36.67 arc-90 34.47,36.94 34.47,36.94 arc-90 34.74,37.21 45.13,37.21 arc90 45.39,37.47 45.39,37.47 arc90 45.13,37.74 34.74,37.74 arc-90 34.47,38.01 34.47,38.01 arc-90 34.74,38.28 45.13,38.28 arc90 45.39,38.54 45.39,38.55 arc90 45.13,38.81 34.74,38.81 arc-90 34.47,39.08 34.47,39.08 arc-90 34.74,39.35 45.13,39.35 arc90 45.39,39.61 45.39,39.62 arc90 45.13,39.88 34.74,39.88 arc-90 34.47,40.15 34.47,40.15 arc-90 34.74,40.42 45.13,40.42 arc90 45.39,40.68 45.39,40.69 arc90 45.13,40.95 34.74,40.95 arc-90 34.47,41.22 34.47,41.22 arc-90 34.74,41.49 45.13,41.49 arc90 45.39,41.76 45.39,41.76 arc90 45.13,42.02 34.74,42.02 arc-90 34.47,42.29 34.47,42.29 arc-90 34.74,42.56 45.13,42.56 arc90 45.39,42.83 45.39,42.83 arc90 45.13,43.09 35.12,43.09 arc-90 34.85,43.36 arc-90 35.12,43.63 44.11,43.63 arc90 44.38,43.9 arc90 44.11,44.16 36.26,44.16 arc-90 35.99,44.43 arc-90 36.26,44.7 42.97,44.7 arc90 43.24,44.97 arc90 42.97,45.24 37.28,45.24 arc-90 37.01,45.5 arc-90 37.28,45.77 41.95,45.77 arc90 42.22,46.04 arc90 41.95,46.31 38.42,46.31 arc-90 38.15,46.57 arc-90 38.42,46.84 41.06,46.84 arc90 41.33,47.11 arc90 41.06,47.38 39.44,47.38 arc-90 39.17,47.64 arc-90 39.44,47.91 40.05,47.91 arc90 40.31,48.18 arc90 40.05,48.45 v40.03,49.5
  Top 0.152: v61.27,79.98 61.46,80.18 61.46,80.6 arc-90 61.73,80.87 arc-90 62,80.6 62,78.98 arc90 62.27,78.71 arc90 62.53,78.98 62.53,81.62 arc-90 62.8,81.89 arc-90 63.07,81.62 63.07,77.96 arc90 63.34,77.7 arc90 63.6,77.96 63.6,82.76 arc-90 63.87,83.03 arc-90 64.14,82.76 64.14,76.82 arc90 64.41,76.55 arc90 64.67,76.82 64.67,83.78 arc-90 64.94,84.05 arc-90 65.21,83.78 65.21,75.8 arc90 65.48,75.54 arc90 65.74,75.8 65.74,84.92 arc-90 66.01,85.19 arc-90 66.28,84.92 66.28,74.92 arc90 66.55,74.65 66.55,74.65 arc90 66.82,74.92 66.82,85.3 arc-90 67.08,85.57 67.08,85.57 arc-90 67.35,85.3 67.35,74.92 arc90 67.62,74.65 67.62,74.65 arc90 67.89,74.92 67.89,85.3 arc-90 68.15,85.57 68.15,85.57 arc-90 68.42,85.3 68.42,74.92 arc90 68.69,74.65 68.69,74.65 arc90 68.96,74.92 68.96,85.3 arc-90 69.22,85.57 69.22,85.57 arc-90 69.49,85.3 69.49,74.92 arc90 69.76,74.65 69.76,74.65 arc90 70.03,74.92 70.03,85.3 arc-90 70.29,85.57 70.3,85.57 arc-90 70.56,85.3 70.56,74.92 arc90 70.83,74.65 70.83,74.65 arc90 71.1,74.92 71.1,85.3 arc-90 71.36,85.57 71.37,85.57 arc-90 71.63,85.3 71.63,74.92 arc90 71.9,74.65 71.9,74.65 arc90 72.17,74.92 72.17,85.3 arc-90 72.43,85.57 72.44,85.57 arc-90 72.7,85.3 72.7,74.92 arc90 72.97,74.65 72.97,74.65 arc90 73.24,74.92 73.24,85.3 arc-90 73.5,85.57 73.51,85.57 arc-90 73.77,85.3 73.77,74.92 arc90 74.04,74.65 74.04,74.65 arc90 74.31,74.92 74.31,85.3 arc-90 74.58,85.57 74.58,85.57 arc-90 74.84,85.3 74.84,74.92 arc90 75.11,74.65 75.11,74.65 arc90 75.38,74.92 75.38,85.3 arc-90 75.65,85.57 75.65,85.57 arc-90 75.91,85.3 75.91,74.92 arc90 76.18,74.65 76.18,74.65 arc90 76.45,74.92 76.45,85.3 arc-90 76.72,85.57 76.72,85.57 arc-90 76.98,85.3 76.98,74.92 arc90 77.25,74.65 77.25,74.65 arc90 77.52,74.92 77.52,85.3 arc-90 77.79,85.57 77.79,85.57 arc-90 78.06,85.3 78.06,74.92 arc90 78.32,74.65 78.32,74.65 arc90 78.59,74.92 78.59,85.3 arc-90 78.86,85.57 78.86,85.57 arc-90 79.13,85.3 79.13,74.92 arc90 79.39,74.65 79.39,74.65 arc90 79.66,74.92 79.66,85.3 arc-90 79.93,85.57 79.93,85.57 arc-90 80.2,85.3 80.2,74.92 arc90 80.46,74.65 80.46,74.65 arc90 80.73,74.92 80.73,85.3 arc-90 81,85.57 81,85.57 arc-90 81.27,85.3 81.27,74.92 arc90 81.53,74.65 81.54,74.65 arc90 81.8,74.92 81.8,85.3 arc-90 82.07,85.57 82.07,85.57 arc-90 82.34,85.3 82.34,74.92 arc90 82.6,74.65 82.61,74.65 arc90 82.87,74.92 82.87,85.3 arc-90 83.14,85.57 83.14,85.57 arc-90 83.41,85.3 83.41,74.92 arc90 83.67,74.65 83.68,74.65 arc90 83.94,74.92 83.94,84.8 arc-90 84.21,85.06 arc-90 84.48,84.8 84.48,75.93 arc90 84.75,75.66 arc90 85.01,75.93 85.01,83.65 arc-90 85.28,83.92 arc-90 85.55,83.65 85.55,76.95 arc90 85.82,76.68 arc90 86.08,76.95 86.08,82.64 arc-90 86.35,82.9 arc-90 86.62,82.64 86.62,77.96 arc90 86.89,77.7 arc90 87.15,77.96 87.15,81.49 arc-90 87.42,81.76 arc-90 87.69,81.49 87.69,78.98 arc90 87.96,78.71 arc90 88.23,78.98 88.23,80.48 arc-90 88.49,80.75 arc-90 88.76,80.48 88.76,80.13 v88.83,80.06
  Top 0.152: v91.67,80.29 91.19,80.29 91.14,80.34 90.86,80.34 90.76,80.24 90.29,79.77 90.08,79.56 90.08,79.28 90.3,79.06 90.3,78.58 90.49,78.39 90.85,78.39 arc-90 91.11,78.12 arc-90 90.85,77.86 89.48,77.86 arc90 89.21,77.59 arc90 89.48,77.32 91.99,77.32 arc-90 92.26,77.05 arc-90 91.99,76.79 88.33,76.79 arc90 88.06,76.52 arc90 88.33,76.25 93.01,76.25 arc-90 93.27,75.98 arc-90 93.01,75.72 87.32,75.72 arc90 87.05,75.45 arc90 87.32,75.18 94.15,75.18 arc-90 94.42,74.91 arc-90 94.15,74.64 86.17,74.64 arc90 85.91,74.38 arc90 86.17,74.11 95.16,74.11 arc-90 95.43,73.84 arc-90 95.16,73.57 85.28,73.57 arc90 85.02,73.31 85.02,73.31 arc90 85.28,73.04 95.55,73.04 arc-90 95.81,72.77 95.81,72.77 arc-90 95.55,72.5 85.28,72.5 arc90 85.02,72.24 85.02,72.24 arc90 85.28,71.97 95.55,71.97 arc-90 95.81,71.7 95.81,71.7 arc-90 95.55,71.43 85.28,71.43 arc90 85.02,71.17 85.02,71.16 arc90 85.28,70.9 95.55,70.9 arc-90 95.81,70.63 95.81,70.63 arc-90 95.55,70.36 85.28,70.36 arc90 85.02,70.1 85.02,70.09 arc90 85.28,69.83 95.55,69.83 arc-90 95.81,69.56 95.81,69.56 arc-90 95.55,69.29 85.28,69.29 arc90 85.02,69.03 85.02,69.02 arc90 85.28,68.76 95.55,68.76 arc-90 95.81,68.49 95.81,68.49 arc-90 95.55,68.22 85.28,68.22 arc90 85.02,67.95 85.02,67.95 arc90 85.28,67.69 95.55,67.69 arc-90 95.81,67.42 95.81,67.42 arc-90 95.55,67.15 85.28,67.15 arc90 85.02,66.88 85.02,66.88 arc90 85.28,66.62 95.55,66.62 arc-90 95.81,66.35 95.81,66.35 arc-90 95.55,66.08 85.28,66.08 arc90 85.02,65.81 85.02,65.81 arc90 85.28,65.55 95.55,65.55 arc-90 95.81,65.28 95.81,65.28 arc-90 95.55,65.01 85.28,65.01 arc90 85.02,64.74 85.02,64.74 arc90 85.28,64.47 95.55,64.47 arc-90 95.81,64.21 95.81,64.21 arc-90 95.55,63.94 85.28,63.94 arc90 85.02,63.67 85.02,63.67 arc90 85.28,63.4 95.55,63.4 arc-90 95.81,63.14 95.81,63.14 arc-90 95.55,62.87 85.28,62.87 arc90 85.02,62.6 85.02,62.6 arc90 85.28,62.33 95.55,62.33 arc-90 95.81,62.07 95.81,62.07 arc-90 95.55,61.8 85.28,61.8 arc90 85.02,61.53 85.02,61.53 arc90 85.28,61.26 95.55,61.26 arc-90 95.81,61 95.81,60.99 arc-90 95.55,60.73 85.28,60.73 arc90 85.02,60.46 85.02,60.46 arc90 85.28,60.19 95.55,60.19 arc-90 95.81,59.93 95.81,59.92 arc-90 95.55,59.66 85.28,59.66 arc90 85.02,59.39 85.02,59.39 arc90 85.28,59.12 95.55,59.12 arc-90 95.81,58.86 95.81,58.85 arc-90 95.55,58.59 85.28,58.59 arc90 85.02,58.32 85.02,58.32 arc90 85.28,58.05 95.55,58.05 arc-90 95.81,57.79 95.81,57.78 arc-90 95.55,57.52 85.28,57.52 arc90 85.02,57.25 85.02,57.25 arc90 85.28,56.98 95.55,56.98 arc-90 95.81,56.71 95.81,56.71 arc-90 95.55,56.45 85.41,56.45 arc90 85.14,56.18 arc90 85.41,55.91 94.91,55.91 arc-90 95.18,55.64 arc-90 94.91,55.38 86.43,55.38 arc90 86.16,55.11 arc90 86.43,54.84 93.89,54.84 arc-90 94.16,54.57 arc-90 93.89,54.31 87.57,54.31 arc90 87.3,54.04 arc90 87.57,53.77 92.75,53.77 arc-90 93.02,53.5 arc-90 92.75,53.23 88.59,53.23 arc90 88.32,52.97 arc90 88.59,52.7 91.74,52.7 arc-90 92,52.43 arc-90 91.74,52.16 89.73,52.16 arc90 89.46,51.9 arc90 89.73,51.63 90.59,51.63 arc-90 90.86,51.36 arc-90 90.59,51.09 90.34,50.84 90.34,49.64
  Top 0.152: v58.25,80.26 58.59,79.92 59.01,80.34 59.15,80.34 59.29,80.34 59.93,79.68 60.03,79.59 60.03,79.58 60.03,79.31 59.93,79.22 59.55,78.83 59.6,78.78 59.6,78.52 59.38,78.52 arc90 59.11,78.25 arc90 59.38,77.98 60.49,77.98 arc-90 60.76,77.72 arc-90 60.49,77.45 58.36,77.45 arc90 58.09,77.18 arc90 58.36,76.91 61.64,76.91 arc-90 61.9,76.64 arc-90 61.64,76.38 57.22,76.38 arc90 56.95,76.11 arc90 57.22,75.84 62.78,75.84 arc-90 63.05,75.57 arc-90 62.78,75.31 56.2,75.31 arc90 55.93,75.04 arc90 56.2,74.77 63.8,74.77 arc-90 64.06,74.5 arc-90 63.8,74.24 55.06,74.24 arc90 54.79,73.97 arc90 55.06,73.7 64.81,73.7 arc-90 65.08,73.43 65.08,73.43 arc-90 64.81,73.17 54.55,73.17 arc90 54.28,72.9 54.28,72.9 arc90 54.55,72.63 64.81,72.63 arc-90 65.08,72.36 65.08,72.36 arc-90 64.81,72.1 54.55,72.1 arc90 54.28,71.83 54.28,71.83 arc90 54.55,71.56 64.81,71.56 arc-90 65.08,71.29 65.08,71.29 arc-90 64.81,71.02 54.55,71.02 arc90 54.28,70.76 54.28,70.76 arc90 54.55,70.49 64.81,70.49 arc-90 65.08,70.22 65.08,70.22 arc-90 64.81,69.95 54.55,69.95 arc90 54.28,69.69 54.28,69.69 arc90 54.55,69.42 64.81,69.42 arc-90 65.08,69.15 65.08,69.15 arc-90 64.81,68.88 54.55,68.88 arc90 54.28,68.62 54.28,68.62 arc90 54.55,68.35 64.81,68.35 arc-90 65.08,68.08 65.08,68.08 arc-90 64.81,67.81 54.55,67.81 arc90 54.28,67.55 54.28,67.54 arc90 54.55,67.28 64.81,67.28 arc-90 65.08,67.01 65.08,67.01 arc-90 64.81,66.74 54.55,66.74 arc90 54.28,66.48 54.28,66.47 arc90 54.55,66.21 64.81,66.21 arc-90 65.08,65.94 65.08,65.94 arc-90 64.81,65.67 54.55,65.67 arc90 54.28,65.41 54.28,65.4 arc90 54.55,65.14 64.81,65.14 arc-90 65.08,64.87 65.08,64.87 arc-90 64.81,64.6 54.55,64.6 arc90 54.28,64.34 54.28,64.33 arc90 54.55,64.07 64.81,64.07 arc-90 65.08,63.8 65.08,63.8 arc-90 64.81,63.53 54.55,63.53 arc90 54.28,63.26 54.28,63.26 arc90 54.55,63 64.81,63 arc-90 65.08,62.73 65.08,62.73 arc-90 64.81,62.46 54.55,62.46 arc90 54.28,62.19 54.28,62.19 arc90 54.55,61.93 64.81,61.93 arc-90 65.08,61.66 65.08,61.66 arc-90 64.81,61.39 54.55,61.39 arc90 54.28,61.12 54.28,61.12 arc90 54.55,60.86 64.81,60.86 arc-90 65.08,60.59 65.08,60.59 arc-90 64.81,60.32 54.55,60.32 arc90 54.28,60.05 54.28,60.05 arc90 54.55,59.78 64.81,59.78 arc-90 65.08,59.52 65.08,59.52 arc-90 64.81,59.25 54.55,59.25 arc90 54.28,58.98 54.28,58.98 arc90 54.55,58.71 64.81,58.71 arc-90 65.08,58.45 65.08,58.45 arc-90 64.81,58.18 54.55,58.18 arc90 54.28,57.91 54.28,57.91 arc90 54.55,57.64 64.81,57.64 arc-90 65.08,57.38 65.08,57.38 arc-90 64.81,57.11 54.55,57.11 arc90 54.28,56.84 54.28,56.84 arc90 54.55,56.57 64.81,56.57 arc-90 65.08,56.31 65.08,56.3 arc-90 64.81,56.04 55.06,56.04 arc90 54.79,55.77 arc90 55.06,55.5 63.8,55.5 arc-90 64.06,55.24 arc-90 63.8,54.97 56.2,54.97 arc90 55.93,54.7 arc90 56.2,54.43 62.78,54.43 arc-90 63.05,54.16 arc-90 62.78,53.9 57.22,53.9 arc90 56.95,53.63 arc90 57.22,53.36 61.64,53.36 arc-90 61.9,53.09 arc-90 61.64,52.83 58.36,52.83 arc90 58.09,52.56 arc90 58.36,52.29 60.62,52.29 arc-90 60.89,52.02 arc-90 60.62,51.76 59.38,51.76 arc90 59.11,51.49 arc90 59.38,51.22 59.6,51.22 59.6,50.79 58.72,49.91 58.45,49.91 v58.35,49.81 58.73,49.43 58.75,49.43 59.73,48.45 arc-90 60,48.18 arc-90 59.73,47.91 59.25,47.91 arc90 58.98,47.64 arc90 59.25,47.38 60.75,47.38 arc-90 61.02,47.11 arc-90 60.75,46.84 58.23,46.84 arc90 57.97,46.57 arc90 58.23,46.31 61.76,46.31 arc-90 62.03,46.04 arc-90 61.76,45.77 57.22,45.77 arc90 56.95,45.5 arc90 57.22,45.24 62.91,45.24 arc-90 63.17,44.97 arc-90 62.91,44.7 56.07,44.7 arc90 55.81,44.43 arc90 56.07,44.16 63.92,44.16 arc-90 64.19,43.9 arc-90 63.92,43.63 55.06,43.63 arc90 54.79,43.36 arc90 55.06,43.09 64.94,43.09 arc-90 65.21,42.83 65.21,42.83 arc-90 64.94,42.56 54.55,42.56 arc90 54.28,42.29 54.28,42.29 arc90 54.55,42.02 64.94,42.02 arc-90 65.21,41.76 65.21,41.76 arc-90 64.94,41.49 54.55,41.49 arc90 54.28,41.22 54.28,41.22 arc90 54.55,40.95 64.94,40.95 arc-90 65.21,40.69 65.21,40.68 arc-90 64.94,40.42 54.55,40.42 arc90 54.28,40.15 54.28,40.15 arc90 54.55,39.88 64.94,39.88 arc-90 65.21,39.62 65.21,39.61 arc-90 64.94,39.35 54.55,39.35 arc90 54.28,39.08 54.28,39.08 arc90 54.55,38.81 64.94,38.81 arc-90 65.21,38.55 65.21,38.54 arc-90 64.94,38.28 54.55,38.28 arc90 54.28,38.01 54.28,38.01 arc90 54.55,37.74 64.94,37.74 arc-90 65.21,37.47 65.21,37.47 arc-90 64.94,37.21 54.55,37.21 arc90 54.28,36.94 54.28,36.94 arc90 54.55,36.67 64.94,36.67 arc-90 65.21,36.4 65.21,36.4 arc-90 64.94,36.14 54.55,36.14 arc90 54.28,35.87 54.28,35.87 arc90 54.55,35.6 64.94,35.6 arc-90 65.21,35.33 65.21,35.33 arc-90 64.94,35.07 54.55,35.07 arc90 54.28,34.8 54.28,34.8 arc90 54.55,34.53 64.94,34.53 arc-90 65.21,34.26 65.21,34.26 arc-90 64.94,33.99 54.55,33.99 arc90 54.28,33.73 54.28,33.73 arc90 54.55,33.46 64.94,33.46 arc-90 65.21,33.19 65.21,33.19 arc-90 64.94,32.92 54.55,32.92 arc90 54.28,32.66 54.28,32.66 arc90 54.55,32.39 64.94,32.39 arc-90 65.21,32.12 65.21,32.12 arc-90 64.94,31.85 54.55,31.85 arc90 54.28,31.59 54.28,31.59 arc90 54.55,31.32 64.94,31.32 arc-90 65.21,31.05 65.21,31.05 arc-90 64.94,30.78 54.55,30.78 arc90 54.28,30.52 54.28,30.51 arc90 54.55,30.25 64.94,30.25 arc-90 65.21,29.98 65.21,29.98 arc-90 64.94,29.71 54.55,29.71 arc90 54.28,29.45 54.28,29.44 arc90 54.55,29.18 64.94,29.18 arc-90 65.21,28.91 65.21,28.91 arc-90 64.94,28.64 54.55,28.64 arc90 54.28,28.38 54.28,28.37 arc90 54.55,28.11 64.94,28.11 arc-90 65.08,27.97 65.08,27.84 arc-90 64.81,27.57 54.55,27.57 arc90 54.28,27.31 54.28,27.3 arc90 54.55,27.04 64.94,27.04 arc-90 65.08,26.9 65.08,26.77 arc-90 64.81,26.5 54.55,26.5 arc90 54.28,26.23 54.28,26.23 arc90 54.55,25.97 64.81,25.97 arc-90 65.14,25.64 arc-90 64.94,25.43 54.93,25.43 arc90 54.66,25.16 arc90 54.93,24.9 63.92,24.9 arc-90 64.19,24.63 arc-90 63.92,24.36 56.07,24.36 arc90 55.81,24.09 arc90 56.07,23.83 62.78,23.83 arc-90 63.05,23.56 arc-90 62.78,23.29 57.09,23.29 arc90 56.82,23.02 arc90 57.09,22.75 61.76,22.75 arc-90 62.03,22.49 arc-90 61.76,22.22 58.23,22.22 arc90 57.97,21.95 arc90 58.23,21.68 60.75,21.68 arc-90 61.02,21.42 arc-90 60.75,21.15 59.25,21.15 arc90 58.98,20.88 arc90 59.25,20.61 59.88,20.61 v60.13,20.37
  Top 0.152: v61.52,49.55 61.45,49.63 61.46,49.64 61.46,50.25 arc-90 61.73,50.52 arc-90 62,50.25 62,48.63 arc90 62.27,48.36 arc90 62.53,48.63 62.53,51.27 arc-90 62.8,51.54 arc-90 63.07,51.27 63.07,47.48 arc90 63.34,47.22 arc90 63.6,47.48 63.6,52.41 arc-90 63.87,52.68 arc-90 64.14,52.41 64.14,46.34 arc90 64.41,46.07 arc90 64.67,46.34 64.67,53.43 arc-90 64.94,53.69 arc-90 65.21,53.43 65.21,45.32 arc90 65.48,45.06 arc90 65.74,45.32 65.74,54.44 arc-90 66.01,54.71 66.01,54.71 arc-90 66.28,54.44 66.28,44.31 arc90 66.55,44.04 66.55,44.04 arc90 66.82,44.31 66.82,54.82 arc-90 67.08,55.09 67.08,55.09 arc-90 67.35,54.82 67.35,44.31 arc90 67.62,44.04 67.62,44.04 arc90 67.89,44.31 67.89,54.82 arc-90 68.15,55.09 68.15,55.09 arc-90 68.42,54.82 68.42,44.31 arc90 68.69,44.04 68.69,44.04 arc90 68.96,44.31 68.96,54.82 arc-90 69.22,55.09 69.22,55.09 arc-90 69.49,54.82 69.49,44.31 arc90 69.76,44.04 69.76,44.04 arc90 70.03,44.31 70.03,54.82 arc-90 70.29,55.09 70.3,55.09 arc-90 70.56,54.82 70.56,44.31 arc90 70.83,44.04 70.83,44.04 arc90 71.1,44.31 71.1,54.82 arc-90 71.36,55.09 71.37,55.09 arc-90 71.63,54.82 71.63,44.31 arc90 71.9,44.04 71.9,44.04 arc90 72.17,44.31 72.17,54.82 arc-90 72.43,55.09 72.44,55.09 arc-90 72.7,54.82 72.7,44.31 arc90 72.97,44.04 72.97,44.04 arc90 73.24,44.31 73.24,54.82 arc-90 73.5,55.09 73.51,55.09 arc-90 73.77,54.82 73.77,44.31 arc90 74.04,44.04 74.04,44.04 arc90 74.31,44.31 74.31,54.82 arc-90 74.58,55.09 74.58,55.09 arc-90 74.84,54.82 74.84,44.31 arc90 75.11,44.04 75.11,44.04 arc90 75.38,44.31 75.38,54.82 arc-90 75.65,55.09 75.65,55.09 arc-90 75.91,54.82 75.91,44.31 arc90 76.18,44.04 76.18,44.04 arc90 76.45,44.31 76.45,54.82 arc-90 76.72,55.09 76.72,55.09 arc-90 76.98,54.82 76.98,44.31 arc90 77.25,44.04 77.25,44.04 arc90 77.52,44.31 77.52,54.82 arc-90 77.79,55.09 77.79,55.09 arc-90 78.06,54.82 78.06,44.31 arc90 78.32,44.04 78.32,44.04 arc90 78.59,44.31 78.59,54.82 arc-90 78.86,55.09 78.86,55.09 arc-90 79.13,54.82 79.13,44.31 arc90 79.39,44.04 79.39,44.04 arc90 79.66,44.31 79.66,54.82 arc-90 79.93,55.09 79.93,55.09 arc-90 80.2,54.82 80.2,44.31 arc90 80.46,44.04 80.46,44.04 arc90 80.73,44.31 80.73,54.82 arc-90 81,55.09 81,55.09 arc-90 81.27,54.82 81.27,44.31 arc90 81.53,44.04 81.54,44.04 arc90 81.8,44.31 81.8,54.82 arc-90 82.07,55.09 82.07,55.09 arc-90 82.34,54.82 82.34,44.31 arc90 82.6,44.04 82.61,44.04 arc90 82.87,44.31 82.87,54.82 arc-90 83.14,55.09 83.14,55.09 arc-90 83.41,54.82 83.41,44.44 arc90 83.68,44.17 arc90 83.94,44.44 83.94,54.44 arc-90 84.21,54.71 arc-90 84.48,54.44 84.48,45.45 arc90 84.75,45.18 arc90 85.01,45.45 85.01,53.3 arc-90 85.28,53.57 arc-90 85.55,53.3 85.55,46.59 arc90 85.82,46.33 arc90 86.08,46.59 86.08,52.28 arc-90 86.35,52.55 arc-90 86.62,52.28 86.62,47.61 arc90 86.89,47.34 arc90 87.15,47.61 87.15,51.27 arc-90 87.42,51.54 arc-90 87.69,51.27 87.69,48.63 arc90 87.96,48.36 arc90 88.23,48.63 88.23,50.12 arc-90 88.49,50.39 arc-90 88.76,50.12 88.76,49.64 arc90 89.03,49.37 arc90 89.3,49.64 90.34,49.64
  Top 0.152: 90.34,49.64 v90.38,49.6 | 90.2,19.1 90.57,18.72 90.76,18.53 90.76,18.26 90.58,18.07 v90.58,17.5 | 90.2,19.1 | 90.2,19.1 90,19.29 89.73,19.29 89.35,18.91 89.17,18.91 89.03,18.77 arc-90 88.76,19.04 88.76,19.39 arc90 88.49,19.66 arc90 88.23,19.39 88.23,18.02 arc-90 87.96,17.75 arc-90 87.69,18.02 87.69,20.53 arc90 87.42,20.8 arc90 87.15,20.53 87.15,16.88 arc-90 86.89,16.61 arc-90 86.62,16.88 86.62,21.55 arc90 86.35,21.82 arc90 86.08,21.55 86.08,15.86 arc-90 85.82,15.59 arc-90 85.55,15.86 85.55,22.69 arc90 85.28,22.96 arc90 85.01,22.69 85.01,14.72 arc-90 84.75,14.45 arc-90 84.48,14.72 84.48,23.71 arc90 84.21,23.98 arc90 83.94,23.71 83.94,13.7 arc-90 83.68,13.43 arc-90 83.41,13.7 83.41,24.09 arc90 83.14,24.36 83.14,24.36 arc90 82.87,24.09 82.87,13.57 arc-90 82.61,13.31 82.6,13.31 arc-90 82.34,13.57 82.34,24.09 arc90 82.07,24.36 82.07,24.36 arc90 81.8,24.09 81.8,13.57 arc-90 81.54,13.31 81.53,13.31 arc-90 81.27,13.57 81.27,24.09 arc90 81,24.36 81,24.36 arc90 80.73,24.09 80.73,13.57 arc-90 80.46,13.31 80.46,13.31 arc-90 80.2,13.57 80.2,24.09 arc90 79.93,24.36 79.93,24.36 arc90 79.66,24.09 79.66,13.57 arc-90 79.39,13.31 79.39,13.31 arc-90 79.13,13.57 79.13,24.09 arc90 78.86,24.36 78.86,24.36 arc90 78.59,24.09 78.59,13.57 arc-90 78.32,13.31 78.32,13.31 arc-90 78.06,13.57 78.06,24.09 arc90 77.79,24.36 77.79,24.36 arc90 77.52,24.09 77.52,13.57 arc-90 77.25,13.31 77.25,13.31 arc-90 76.98,13.57 76.98,24.09 arc90 76.72,24.36 76.72,24.36 arc90 76.45,24.09 76.45,13.57 arc-90 76.18,13.31 76.18,13.31 arc-90 75.91,13.57 75.91,24.09 arc90 75.65,24.36 75.65,24.36 arc90 75.38,24.09 75.38,13.57 arc-90 75.11,13.31 75.11,13.31 arc-90 74.84,13.57 74.84,24.09 arc90 74.58,24.36 74.58,24.36 arc90 74.31,24.09 74.31,13.57 arc-90 74.04,13.31 74.04,13.31 arc-90 73.77,13.57 73.77,24.09 arc90 73.51,24.36 73.5,24.36 arc90 73.24,24.09 73.24,13.57 arc-90 72.97,13.31 72.97,13.31 arc-90 72.7,13.57 72.7,24.09 arc90 72.44,24.36 72.43,24.36 arc90 72.17,24.09 72.17,13.57 arc-90 71.9,13.31 71.9,13.31 arc-90 71.63,13.57 71.63,24.09 arc90 71.37,24.36 71.36,24.36 arc90 71.1,24.09 71.1,13.57 arc-90 70.83,13.31 70.83,13.31 arc-90 70.56,13.57 70.56,24.09 arc90 70.3,24.36 70.29,24.36 arc90 70.03,24.09 70.03,13.57 arc-90 69.76,13.31 69.76,13.31 arc-90 69.49,13.57 69.49,24.09 arc90 69.22,24.36 69.22,24.36 arc90 68.96,24.09 68.96,13.57 arc-90 68.69,13.31 68.69,13.31 arc-90 68.42,13.57 68.42,24.09 arc90 68.15,24.36 68.15,24.36 arc90 67.89,24.09 67.89,13.57 arc-90 67.62,13.31 67.62,13.31 arc-90 67.35,13.57 67.35,24.09 arc90 67.08,24.36 67.08,24.36 arc90 66.82,24.09 66.82,13.57 arc-90 66.55,13.31 66.55,13.31 arc-90 66.28,13.57 66.28,23.71 arc90 66.01,23.98 arc90 65.74,23.71 65.74,14.59 arc-90 65.48,14.32 arc-90 65.21,14.59 65.21,22.69 arc90 64.94,22.96 arc90 64.67,22.69 64.67,15.61 arc-90 64.41,15.34 arc-90 64.14,15.61 64.14,21.68 arc90 63.87,21.94 arc90 63.6,21.68 63.6,16.75 arc-90 63.34,16.48 arc-90 63.07,16.75 63.07,20.53 arc90 62.8,20.8 arc90 62.53,20.53 62.53,17.89 arc-90 62.27,17.62 arc-90 62,17.89 62,19.52 arc90 61.73,19.79 arc90 61.46,19.52 61.46,18.91 arc-90 61.2,18.64 60.93,18.91 60.77,18.91 60.51,19.17 60.41,19.27 60.12,19.27 59.38,18.52 59.38,18.79 v57.69,18.79
  Top 0.152: v40.29,17.6 40.29,18.22 40.33,18.26 40.33,18.53 39.57,19.29 39.29,19.29 39.1,19.1 38.79,19.1 38.23,19.66 38.07,19.66 arc90 37.81,19.39 37.81,18.02 arc-90 37.54,17.75 arc-90 37.27,18.02 37.27,20.53 arc90 37,20.8 arc90 36.74,20.53 36.74,16.88 arc-90 36.47,16.61 arc-90 36.2,16.88 36.2,21.55 arc90 35.93,21.82 arc90 35.67,21.55 35.67,15.86 arc-90 35.4,15.59 arc-90 35.13,15.86 35.13,22.57 arc90 34.86,22.83 arc90 34.59,22.57 34.59,14.72 arc-90 34.33,14.45 arc-90 34.06,14.72 34.06,23.71 arc90 33.79,23.98 arc90 33.52,23.71 33.52,13.7 arc-90 33.19,13.37 arc-90 32.99,13.57 32.99,24.09 arc90 32.72,24.36 32.72,24.36 arc90 32.45,24.09 32.45,13.57 arc-90 32.19,13.31 32.19,13.31 arc-90 31.92,13.57 31.92,24.09 arc90 31.65,24.36 31.65,24.36 arc90 31.38,24.09 31.38,13.57 arc-90 31.12,13.31 31.11,13.31 arc-90 30.85,13.57 30.85,24.09 arc90 30.58,24.36 30.58,24.36 arc90 30.31,24.09 30.31,13.57 arc-90 30.05,13.31 30.04,13.31 arc-90 29.78,13.57 29.78,24.09 arc90 29.51,24.36 29.51,24.36 arc90 29.24,24.09 29.24,13.57 arc-90 28.98,13.31 28.97,13.31 arc-90 28.71,13.57 28.71,24.09 arc90 28.44,24.36 28.44,24.36 arc90 28.17,24.09 28.17,13.57 arc-90 27.9,13.31 27.9,13.31 arc-90 27.64,13.57 27.64,24.09 arc90 27.37,24.36 27.37,24.36 arc90 27.1,24.09 27.1,13.57 arc-90 26.83,13.31 26.83,13.31 arc-90 26.57,13.57 26.57,24.09 arc90 26.3,24.36 26.3,24.36 arc90 26.03,24.09 26.03,13.57 arc-90 25.76,13.31 25.76,13.31 arc-90 25.5,13.57 25.5,24.09 arc90 25.23,24.36 25.23,24.36 arc90 24.96,24.09 24.96,13.57 arc-90 24.69,13.31 24.69,13.31 arc-90 24.42,13.57 24.42,24.09 arc90 24.16,24.36 24.16,24.36 arc90 23.89,24.09 23.89,13.57 arc-90 23.62,13.31 23.62,13.31 arc-90 23.35,13.57 23.35,24.09 arc90 23.09,24.36 23.09,24.36 arc90 22.82,24.09 22.82,13.57 arc-90 22.55,13.31 22.55,13.31 arc-90 22.28,13.57 22.28,24.09 arc90 22.02,24.36 22.02,24.36 arc90 21.75,24.09 21.75,13.57 arc-90 21.48,13.31 21.48,13.31 arc-90 21.21,13.57 21.21,24.09 arc90 20.95,24.36 20.94,24.36 arc90 20.68,24.09 20.68,13.57 arc-90 20.41,13.31 20.41,13.31 arc-90 20.14,13.57 20.14,24.09 arc90 19.88,24.36 19.87,24.36 arc90 19.61,24.09 19.61,13.57 arc-90 19.34,13.31 19.34,13.31 arc-90 19.07,13.57 19.07,24.09 arc90 18.81,24.36 18.8,24.36 arc90 18.54,24.09 18.54,13.57 arc-90 18.27,13.31 18.27,13.31 arc-90 18,13.57 18,24.09 arc90 17.74,24.36 17.73,24.36 arc90 17.47,24.09 17.47,13.57 arc-90 17.2,13.31 17.2,13.31 arc-90 16.93,13.57 16.93,24.09 arc90 16.66,24.36 16.66,24.36 arc90 16.4,24.09 16.4,13.57 arc-90 16.13,13.31 16.13,13.31 arc-90 15.86,13.57 15.86,23.96 arc90 15.66,24.17 arc90 15.33,23.84 15.33,14.59 arc-90 15.06,14.32 arc-90 14.79,14.59 14.79,22.69 arc90 14.52,22.96 arc90 14.26,22.69 14.26,15.61 arc-90 13.99,15.34 arc-90 13.72,15.61 13.72,21.68 arc90 13.45,21.94 arc90 13.18,21.68 13.18,16.75 arc-90 12.92,16.48 arc-90 12.65,16.75 12.65,20.53 arc90 12.38,20.8 arc90 12.11,20.53 12.11,17.77 arc-90 11.85,17.5 arc-90 11.58,17.77 11.58,19.52 arc90 11.31,19.79 arc90 11.04,19.52 10.7,19.17 10.07,19.17 9.98,19.27 9.69,19.27 9.26,18.84 v7.57,18.84
  Top 0.152: v112.58,87.98 112.58,86.26 112.46,86.14 arc90 112.19,85.87 arc90 112.46,85.61 115.23,85.61 arc-90 115.5,85.34 arc-90 115.23,85.07 108.78,85.07 arc90 108.51,84.8 arc90 108.78,84.53 117.26,84.53 arc-90 117.53,84.26 arc-90 117.26,83.99 107.26,83.99 arc90 106.99,83.72 arc90 107.26,83.45 118.41,83.45 arc-90 118.67,83.18 arc-90 118.41,82.91 106.24,82.91 arc90 105.97,82.64 arc90 106.24,82.38 119.29,82.38 arc-90 119.56,82.11 arc-90 119.29,81.84 105.6,81.84 arc90 105.34,81.57 arc90 105.6,81.3 119.8,81.3 arc-90 120.07,81.03 arc-90 119.8,80.76 105.1,80.76 arc90 104.83,80.49 arc90 105.1,80.22 120.18,80.22 arc-90 120.45,79.95 arc-90 120.18,79.68 104.84,79.68 arc90 104.58,79.42 104.58,79.41 arc90 104.84,79.15 120.44,79.15 arc-90 120.71,78.88 arc-90 120.44,78.61 104.59,78.61 arc90 104.32,78.34 arc90 104.59,78.07 120.56,78.07 arc-90 120.83,77.8 arc-90 120.56,77.53 104.59,77.53 arc90 104.32,77.26 arc90 104.59,76.99 120.44,76.99 arc-90 120.7,76.72 120.7,76.72 arc-90 120.44,76.45 104.84,76.45 arc90 104.58,76.19 104.58,76.18 arc90 104.84,75.91 120.18,75.91 arc-90 120.45,75.65 arc-90 120.18,75.38 105.1,75.38 arc90 104.83,75.11 arc90 105.1,74.84 119.8,74.84 arc-90 120.07,74.57 arc-90 119.8,74.3 105.6,74.3 arc90 105.34,74.03 arc90 105.6,73.76 119.29,73.76 arc-90 119.56,73.49 arc-90 119.29,73.22 106.24,73.22 arc90 105.97,72.95 arc90 106.24,72.68 118.41,72.68 arc-90 118.67,72.42 arc-90 118.41,72.15 107.26,72.15 arc90 106.99,71.88 arc90 107.26,71.61 117.26,71.61 arc-90 117.53,71.34 arc-90 117.26,71.07 108.65,71.07 arc90 108.38,70.8 arc90 108.65,70.53 115.23,70.53 arc-90 115.5,70.26 arc-90 115.23,69.99 112.8,69.99 v112.7,69.9